# EAGLE board VCO-v1 (EAGLE 6.6.0)
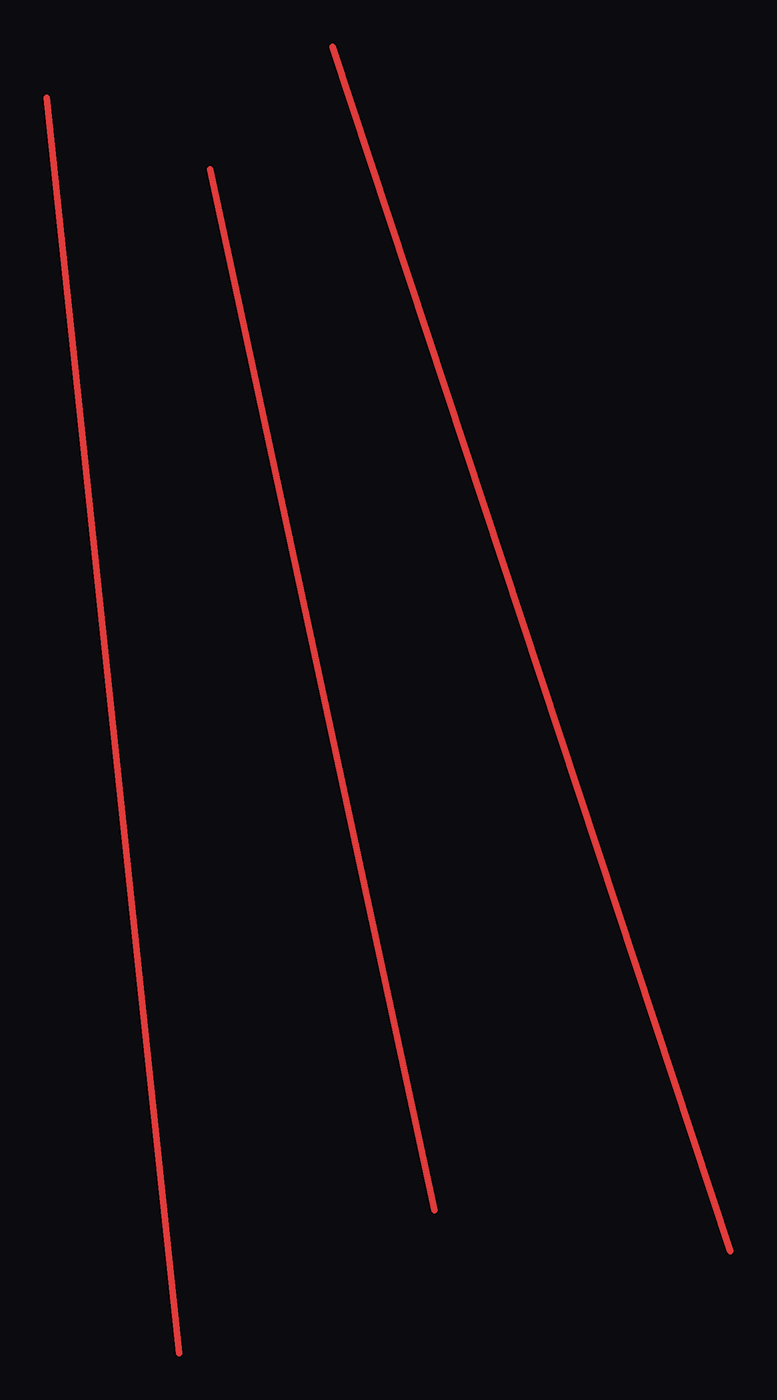
[diagram p0: board, top side]

No outline drawn. Coordinates in mm, seen from the top.
Copper layers (1*16): Top 0.035mm / dielectric 1.5mm / Bottom 0.035mm
Design rules "default": minimum track width 10mil, minimum drill 24mil, track to track 8mil, track to pad 8mil, pad to pad 8mil, via to via 8mil, smd to smd 8mil, copper to edge 40mil, drill to drill 8mil, minimum pad ring 10mil, minimum via ring 8mil, stop-mask expansion 4mil, vias tented up to drill 0mil, thermal gap 10mil

## Placement (x,y rotation side)
E$1  [TOGGLE_SWITCH_TAYDA]  43.18,64.77 0 top
E$2  [POTENTIOMETER_TAYDA_6MM]  13.97,92.71 0 top
E$3  [POTENTIOMETER_TAYDA_6MM]  20.32,63.5 0 top
E$4  [3.5MM_JACK_TAYDA]  36.83,82.55 90 top
E$5  [3.5MM_JACK_TAYDA]  36.83,113.03 90 top
E$6  [4U_2]  0,0 0 top
E$7  [3.5MM_JACK_TAYDA]  36.83,97.79 90 top
E$8  [KNOB_BOSS-LARGE]  27.94,27.94 180 top
E$9  [3.5MM_JACK_TAYDA]  36.83,143.51 90 top
E$10  [KNOB_BOSS_MEDIUM]  20.32,63.5 0 top
E$11  [3.5MM_JACK_TAYDA]  36.83,128.27 90 top
E$12  [3.5MM_JACK_TAYDA]  36.83,158.75 90 top
E$13  [KNBO_BOSS_SMALL]  13.97,92.71 0 top
E$14  [POTENTIOMETER_TAYDA_6MM]  27.94,27.94 270 top
E$15  [LED_3MM]  45.72,158.75 0 top
E$17  [LED_3MM]  45.72,143.51 0 top
E$20  [LED_3MM]  45.72,128.27 0 top
E$23  [LED_3MM]  45.72,113.03 0 top
E$25  [LED_3MM]  45.72,97.79 0 top
E$27  [LED_3MM]  45.72,82.55 0 top
E$29  [3.5MM_JACK_TAYDA]  13.97,158.75 270 top
E$30  [3.5MM_JACK_TAYDA]  13.97,128.27 270 top
E$31  [3.5MM_JACK_TAYDA]  13.97,143.51 270 top
E$33  [3.5MM_JACK_TAYDA]  13.97,113.03 270 top
E$37  [LED_3MM]  5.08,113.03 180 top
E$38  [LED_3MM]  5.08,128.27 180 top
E$39  [LED_3MM]  5.08,143.51 180 top
E$40  [LED_3MM]  5.08,158.75 180 top

## Library data of the parts
E$1-E$15 E$17 E$20 E$23 E$25 E$27 E$29-E$31 E$33 E$37-E$40 = !synth_panel

## Tracks (layer width: path | path; a pad name or v marks a point on that pad's centre or on a via)
S$1
  Top 0.406: 13.97,92.71 27.94,27.94
S$2
  Top 0.406: 3.81,97.16 12.06,19.05
S$3
  Top 0.406: 46.35,25.4 21.59,100.33

## Text on the board
PanelText: CV-A | Ramp Down | CV-B | Ramp Up | PWM | Triangle | RST | Sine | PWM-OFFSET | Square | PWM | CV-B ATTN | VCO | LFO | CV-A MANUAL | VCO-v1